# Altium PCB Window Comparator.PcbDoc
Units mil, origin at the board's own origin, x right, y up, seen from the top; angles counter-clockwise.
Board outline 1968.5 x 1771.65 mil, 4 copper layers (Top Layer, Layer 2, Layer 3, Bottom Layer), stack 22.378 mil thick; 17 components, 9 nets, 45 pads, 11 vias.
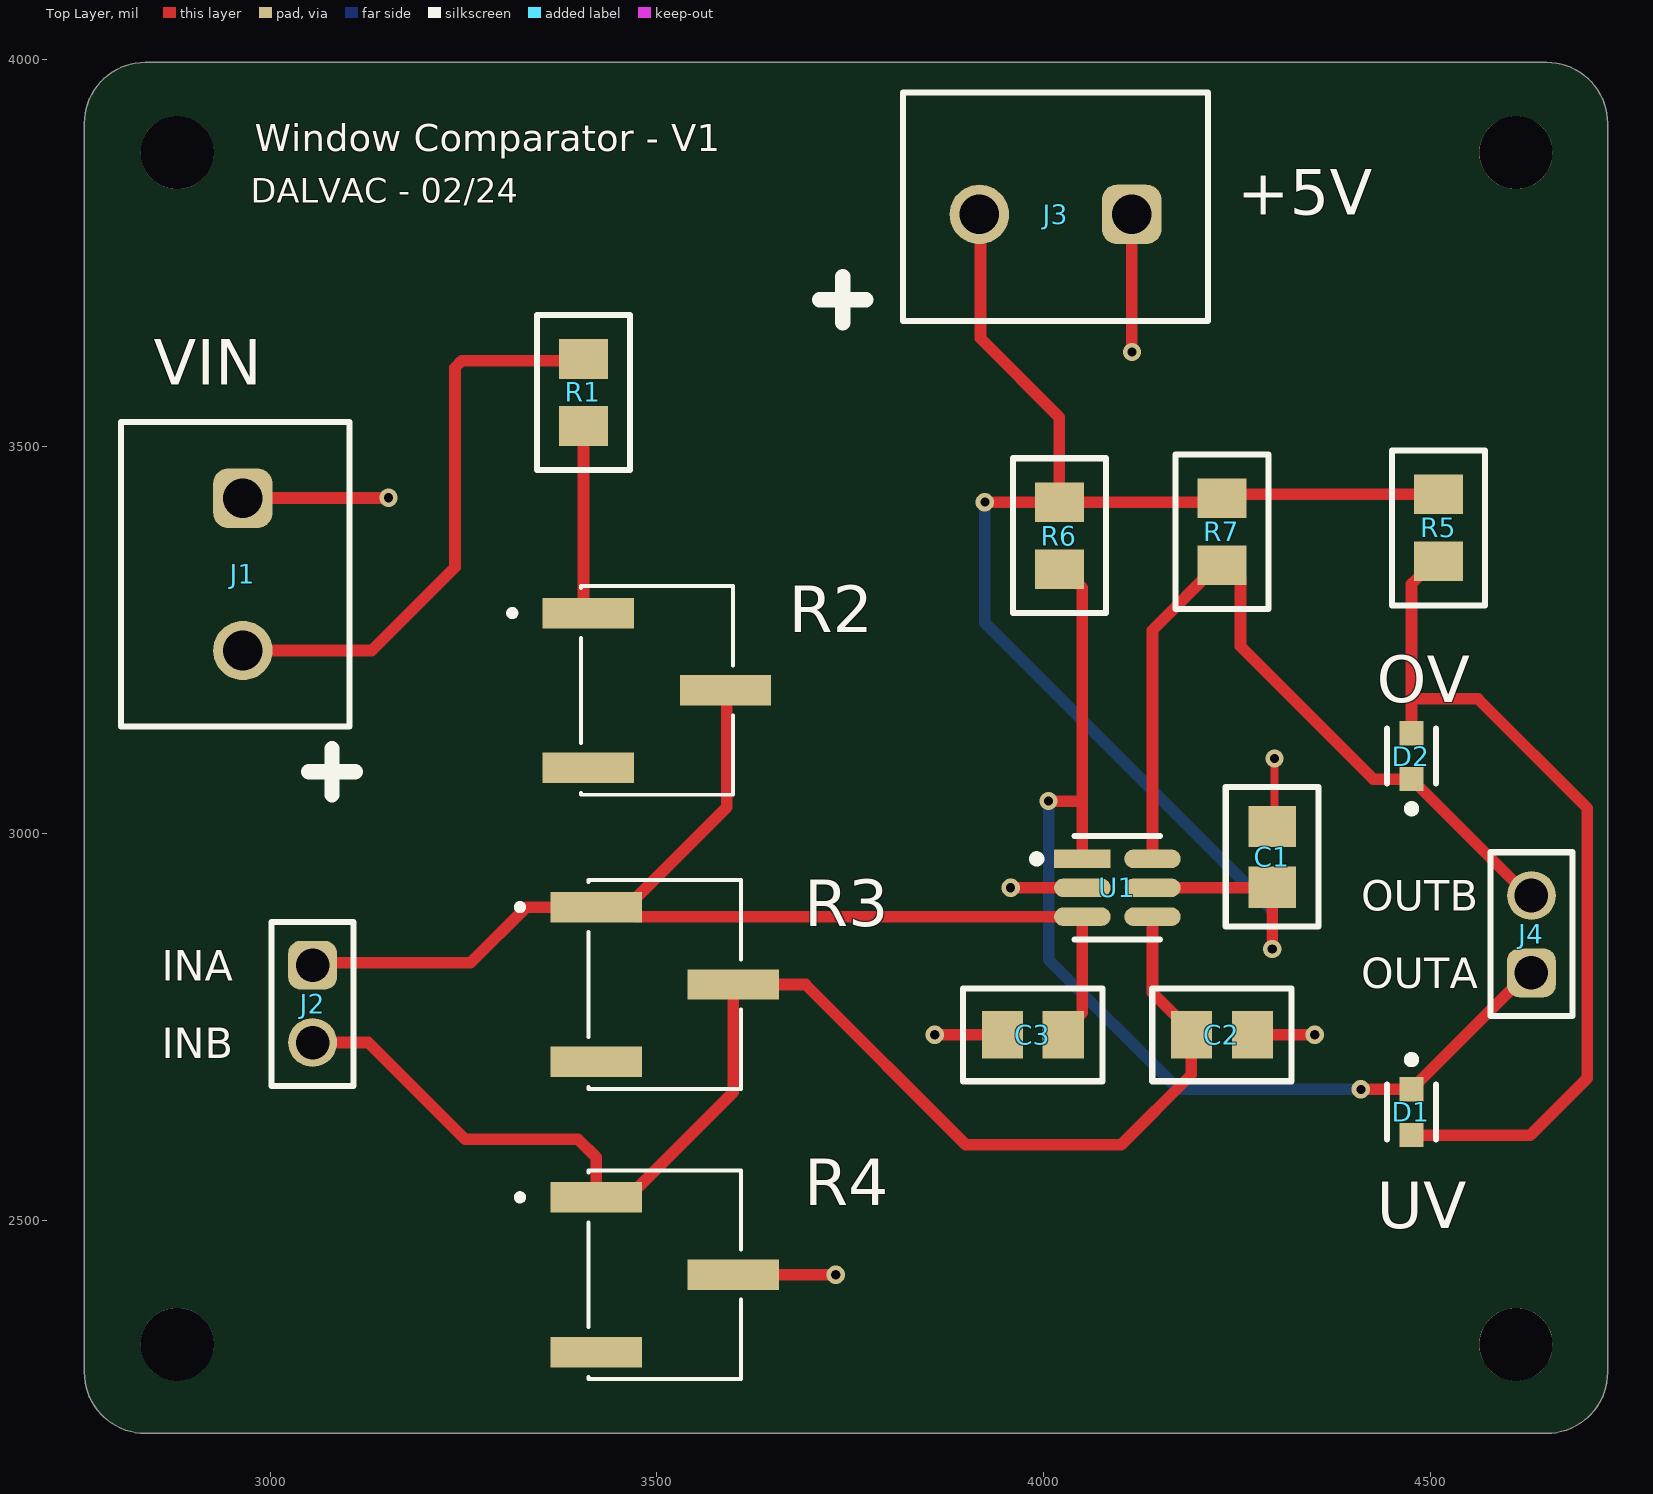
[diagram p0: Top Layer view]
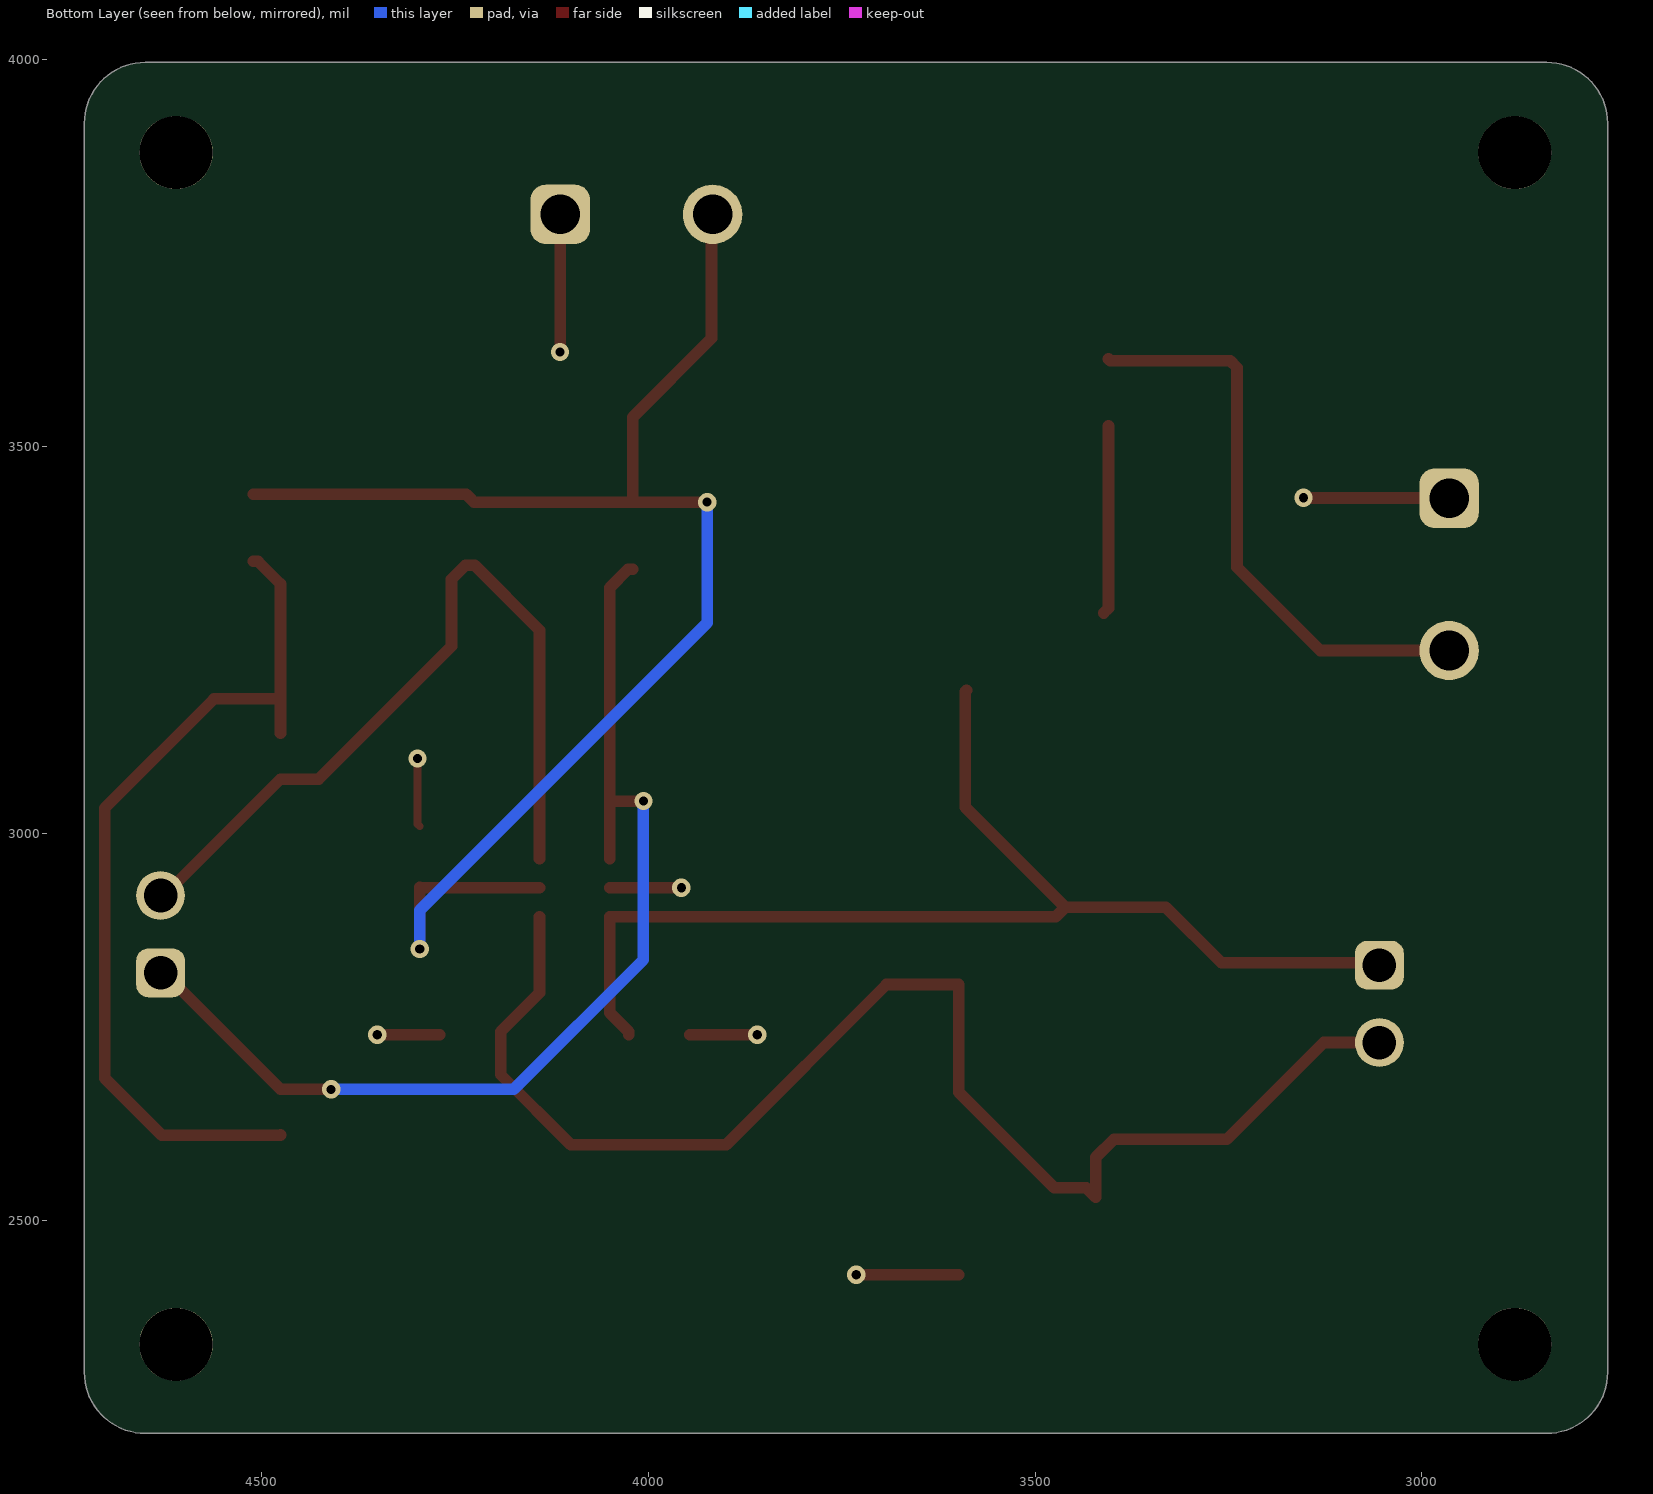
[diagram p1: Bottom Layer view, seen from below]
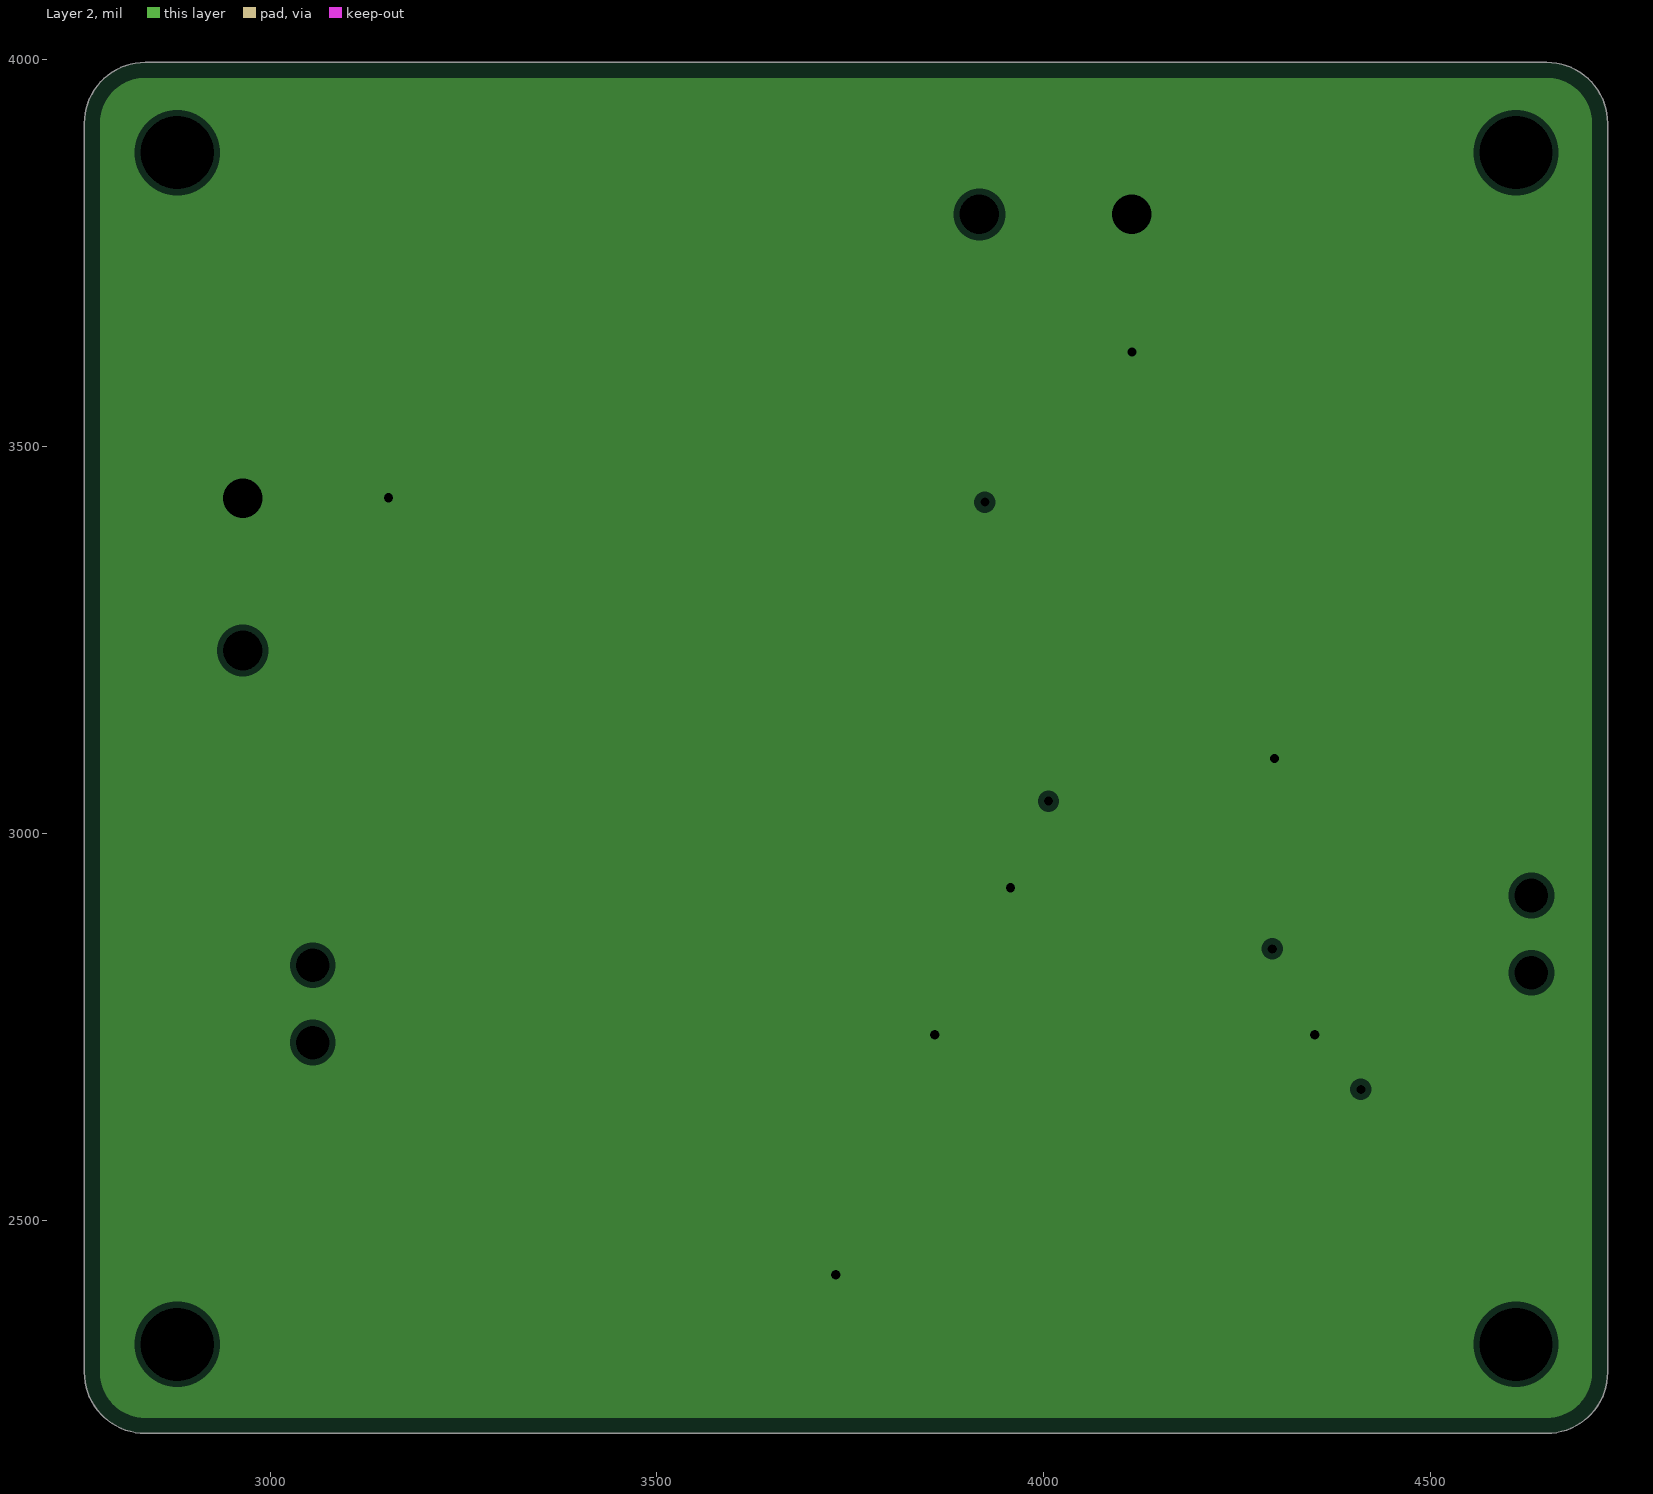
[diagram p2: Layer 2, clearances drawn from the general rule]
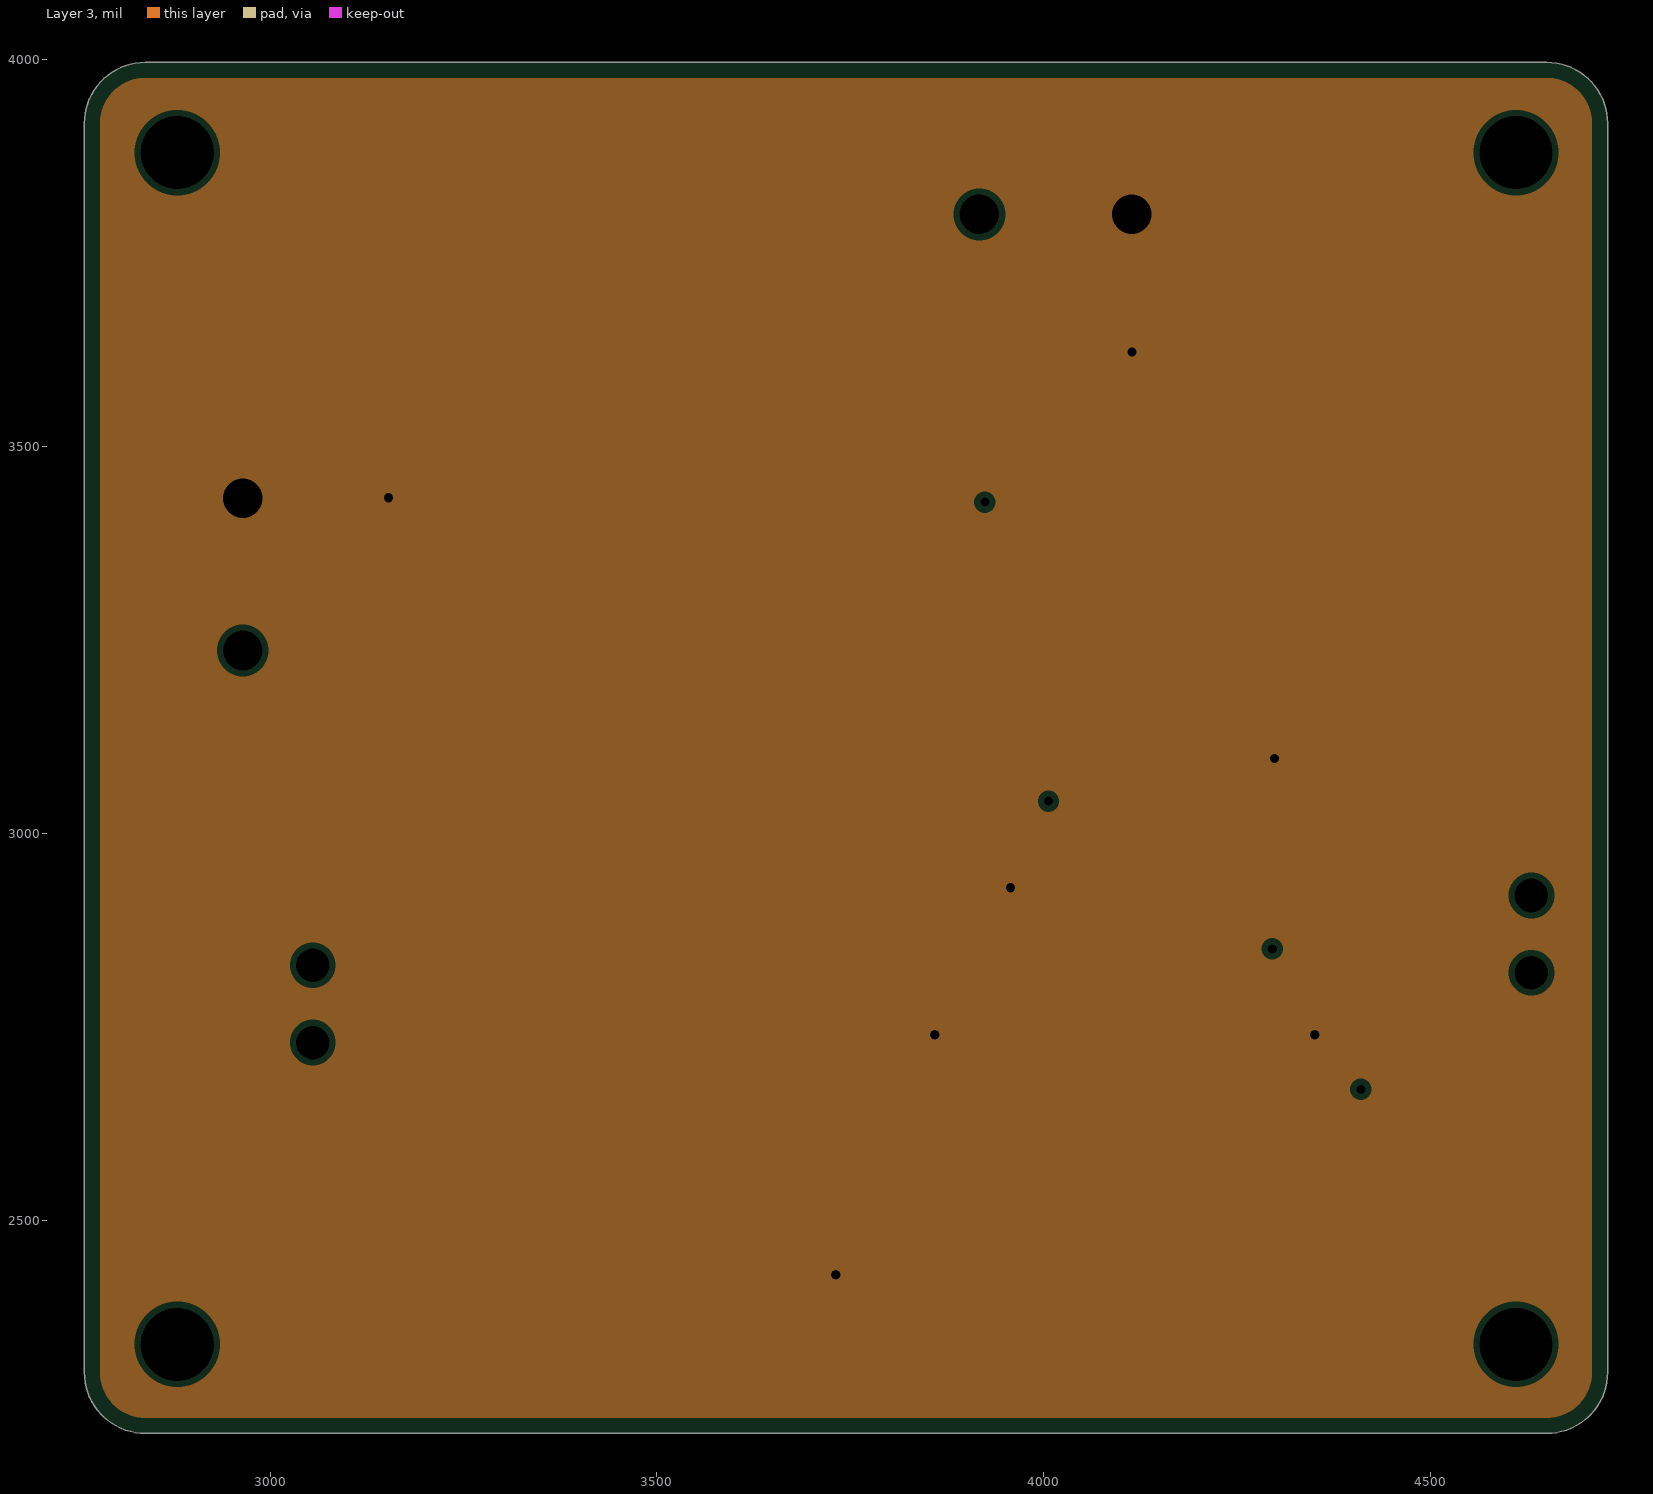
[diagram p3: Layer 3, clearances drawn from the general rule]
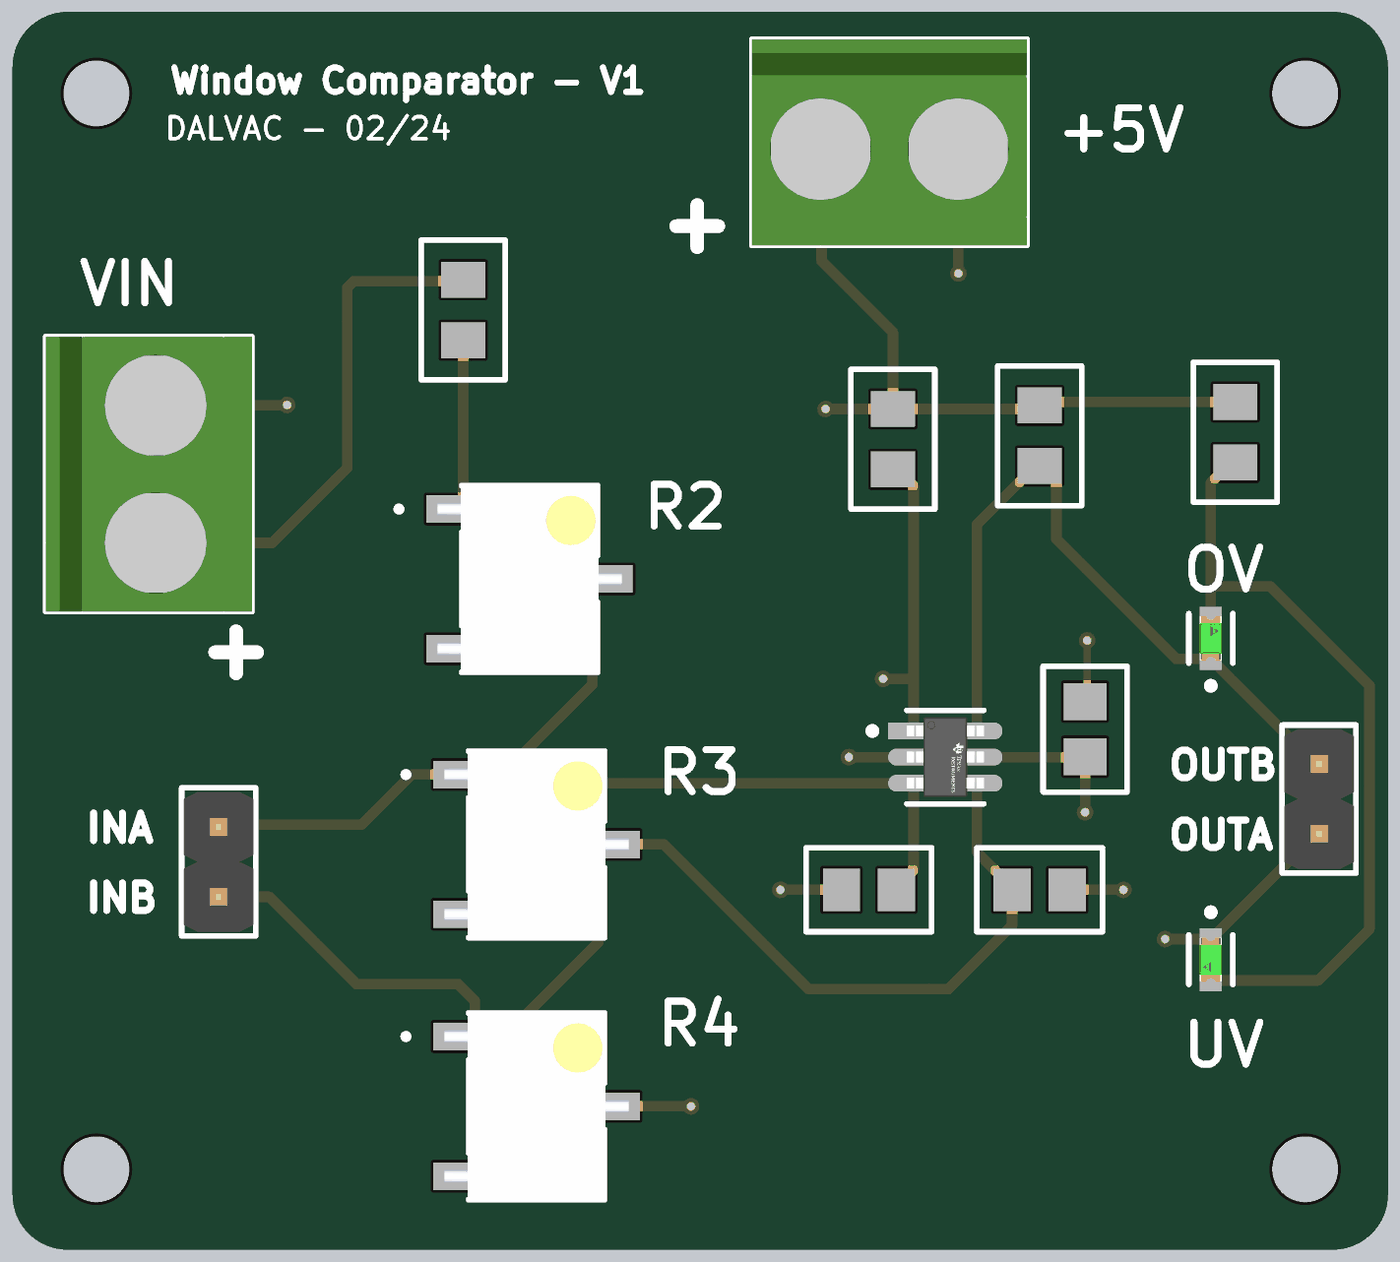
[diagram p4: 3D render of the assembled board from above, using the file's embedded part models]

## Layer stack, top to bottom
Top Solder: solder mask 0.4, Solder Resist, Dk 3.5
Top Layer: signal copper 1.4
Dielectric 2: prepreg 2.8, PP-006, Dk 4.1
Layer 2: plane copper 0.689, net GND
Core: core 12.6, FR-4, Dk 4.8
Layer 3: plane copper 0.689, net GND
Dielectric 3: prepreg 2.8, PP-006, Dk 4.1
Bottom Layer: signal copper 1.4
Bottom Solder: solder mask 0.4, Solder Resist, Dk 3.5

## Board outline
2760,2303.74 2760,3917.91 cw(c2838.74,3917.91) 2838.74,3996.65 4649.76,3996.65 cw(c4649.76,3917.91) 4728.5,3917.91 4728.5,2303.74 cw(c4649.76,2303.74) 4649.76,2225 2838.74,2225 cw(c2838.74,2303.74)

## Design rules (kind name [scope] priority, off if disabled: settings)
Clearance [All] p1: gap=0.25 ignorepadtopadclearanceinfootprint=FALSE
HoleSize [All] p1: absolutevalues=TRUE maxlimit=250 minlimit=7.87 maxpercent=80.000 minpercent=20.000
PlaneClearance [All] p1: clearance=7.87
PlaneConnect [All] p1: planeconnectstyle=Direct reliefexpansion=20 reliefentries=4 reliefconductorwidth=10 reliefairgap=10
PolygonConnect [All] p1: connectstyle=Relief reliefconductorwidth=10 reliefentries=4 polygonreliefangle="90 Angle" airgapwidth=10
RoutingVias [All] p1: holewidth=7.87 width=11.81 viastyle="Through Hole" minholewidth=5.91 minwidth=9.84 maxholewidth=28 maxwidth=50
SolderMaskExpansion [All] p1: expansion=4 istentingtop=FALSE
Width [All] p1: maxlimit=39.37 minlimit=3.54 preferedwidth=11.81
27 further rules are at their usual default settings.

## Components (designator, comment, footprint, x,y, rotation, side; value= is the part's Value field where it differs from the comment)
C1 "10nF" C0805 4295,2970 r90 top
C2 "10nF" C0805 4230,2740 r0 top
C3 "10nF" C0805 3985.63,2740 r180 top
D1 "RED" "LED RED" 4475,2640 r270 top
D2 "RED" "LED RED" 4475,3100 r90 top
J1 "691137710002" "Wire terminal" 2955,3335 r270 top
J2 "61300211121" "Pin connector" 3055,2780 r270 top
J3 "691137710002" "Wire terminal" 4015,3810 r180 top
J4 "61300211121" "Pin connector" 4630,2870 r90 top
R1 "64k9" R0805 3405,3570 r90 top value=64.9kR
R2 "50k" "TS63Y Trimmer" 3500,3185 r0 top value=50kR
R3 "20k" "TS63Y Trimmer" 3510,2805 r0 top value=20kR
R4 "20k" "TS63Y Trimmer" 3510,2430 r0 top value=20kR
R5 "330" R0805 4510,3395 r90 top value=330R
R6 "5k" R0805 4020,3385 r90 top value=5kR
R7 "5k" R0805 4230,3390 r90 top value=5kR
U1 "TLV6710DDCR" TLV6710DDCR 4095,2930 r0 top

## Footprints (in the part's own frame and the unit in brackets; to place one, negate y for a bottom-side part, rotate by r counter-clockwise, add the part's x,y. Pads: shape width x height; smd on the part's side, far side on the other; paste and mask are expansions set on the pad)
C0805 [mm]
  rect 1.35x1.55 smd: 1(-1,0) 2(1,0)
  silkscreen extent -2.29,-1.52 2.29,1.52
"LED RED" [mm]
  rect 0.8x0.8 smd paste+0 mask+0: 1(-0.75,0) 2(0.75,0)
  silkscreen extent -1.85,-0.8 0.9,0.8, body extent -1.25,-0.6 1.25,0.6, height 0.25
"Pin connector" [mm]
  rrect50% 1.6x1.6 hole 1.1: 1(-1.27,0)
  round 1.6 hole 1.1: 2(1.27,0)
  silkscreen extent -2.69,-1.35 2.69,1.35, body extent -2.54,-1.27 2.54,1.27, height 8.57
R0805 [mm]
  rect 1.3x1.6 smd: 1(-1.1,0) 2(1.1,0)
  silkscreen extent -2.54,-1.52 2.54,1.52
TLV6710DDCR [mm]
  rect 1.854x0.612 smd paste+0 mask+0: 1(-1.15,0.95)
  rrect100% 1.854x0.612 smd paste+0 mask+0: 2(-1.15,0) 3(-1.15,-0.95) 4(1.15,-0.95) 5(1.15,0) 6(1.15,0.95)
  silkscreen extent -2.77,-1.7 1.4,1.7, body extent -2.58,-1.95 2.58,1.95, height 0.25
"TS63Y Trimmer" [mm]
  rect 3x1 smd: 1(-2.25,2.54) 2(2.25,0) 3(-2.25,-2.54)
  silkscreen extent -4.85,-3.42 2.5,3.42, body extent -3.35,-3.42 3.35,3.42, height 8
"Wire terminal" [mm]
  rrect50% 1.95x1.95 hole 1.3: 1(-2.5,0.25)
  round 1.95 hole 1.3: 2(2.5,0.25)
  silkscreen extent -5,-3.75 5,3.75, body extent -5,-3.75 5,3.75, height 11.6

## Part data
C1 C2 C3: library part C0805C103K5RECAUTO, "Ceramic Capacitor, Multilayer, Ceramic, 50V, 10% +Tol, 10% -Tol, X7R, 15% TC, 0.01uF, Surface Mount, 0805", Capacitor Type=Ceramic, Manufacturer=KEMET, Supplier Part Number=76AH8705, Category="Ceramic Capacitors", ComponentLink1Description=https://datasheet.ciiva.com:443/pdfs/VipMasterIC/IC/KEME/KEME-S-A0008958450/KEME-S-A0008958450-1.pdf?src-supplier=IHS+Markit, ComponentLink1URL=https://datasheet.ciiva.com:443/pdfs/VipMasterIC/IC/KEME/KEME-S-A0008958450/KEME-S-A0008958450-1.pdf?src-supplier=IHS+Markit, ComponentLink2Description=http://www.farnell.com/datasheets/2723804.pdf?src-supplier=Farnell, ComponentLink2URL=http://www.farnell.com/datasheets/2723804.pdf?src-supplier=Farnell, ComponentLink3Description=https://api.kemet.com/component-edge/download/datasheet/C0805C103K5RECAUTO.pdf?src-supplier=Digikey, ComponentLink3URL=https://api.kemet.com/component-edge/download/datasheet/C0805C103K5RECAUTO.pdf?src-supplier=Digikey, ComponentLink4Description=http://www.farnell.com/datasheets/2723804.pdf?src-supplier=Newark, ComponentLink4URL=http://www.farnell.com/datasheets/2723804.pdf?src-supplier=Newark, Dielectric Material=Ceramic, Manufacturer Part Number=C0805C103K5RECAUTO, Pins=2, Pricing="1=0.015, 25=0.015, 50=0.015 (USD)", Reach SVHC Compliant=Yes, RoHS=Yes, RoHS Compliant=Yes, Stock=500, Supplier=Newark
D1 D2: library part VLMS1300-GS08, "Single Color LED, Super Red, 1.1mm", Color=Red, Forward Current=30mA, Forward Voltage=2.4V, Manufacturer="Vishay Semiconductors", Max Operating Temperature=85°C, Min Operating Temperature=-35°C, Reverse Voltage-Max=5V, Supplier Part Number=78-VLMS1300-GS08, Additional Feature="HIGH RELIABILITY", Category=LEDs, Channels=1, Color@wavelength=Red, ComponentLink1Description=https://datasheet.ciiva.com:443/pdfs/VipMasterIC/IC/VISH/VISH-S-A0004564149/VISH-S-A0004564149-1.pdf?src-supplier=IHS+Markit, ComponentLink1URL=https://datasheet.ciiva.com:443/pdfs/VipMasterIC/IC/VISH/VISH-S-A0004564149/VISH-S-A0004564149-1.pdf?src-supplier=IHS+Markit, ComponentLink2Description=https://datasheet.ciiva.com/26322/vlmo1300-26322153.pdf?src-supplier=Element14, ComponentLink2URL=https://datasheet.ciiva.com/26322/vlmo1300-26322153.pdf?src-supplier=Element14, ComponentLink3Description=https://datasheet.ciiva.com/8028/vlmo1300-8028047.pdf?src-supplier=Element14, ComponentLink3URL=https://datasheet.ciiva.com/8028/vlmo1300-8028047.pdf?src-supplier=Element14, ComponentLink4Description=https://datasheet.ciiva.com/9333/vlmo1300-9333743.pdf?src-supplier=Avnet, ComponentLink4URL=https://datasheet.ciiva.com/9333/vlmo1300-9333743.pdf?src-supplier=Avnet, ComponentLink5Description=https://datasheet.ciiva.com/16510/vlmo1300-16510985.pdf?src-supplier=Future+Electronics, ComponentLink5URL=https://datasheet.ciiva.com/16510/vlmo1300-16510985.pdf?src-supplier=Future+Electronics, Luminous Intensity-Nom=54mcd, Manufacturer Part Number=VLMS1300-GS08, Mounting Technology="Surface Mount", Optoelectronic Device Type="SINGLE COLOR LED", Overall Height=0.8mm, Packaging="Tape and Reel", Pins=2, Pricing="1=0.27, 10=0.217, 50=0.217, 100=0.091, 1000=0.075, 10000=0.052 (USD)", Reach SVHC Compliant=Yes, RoHS=Yes, RoHS Compliant=Yes, Shape=Rectangular, Size=1.1mm, Stock=39915, Supplier=Mouser, Terminal Pitch=1.5mm, Viewing Angle=130°
J1 J3: "Barrier Strip Terminal Block", Manufacturer="Wurth Electronics", Supplier Part Number=1770020, Category="Terminal Blocks", ComponentLink1Description=https://datasheet.ciiva.com:443/pdfs/VipMasterIC/IC/MIDC/MIDC-S-A0005074262/MIDC-S-A0004711666-1.pdf?src-supplier=IHS+Markit, ComponentLink1URL=https://datasheet.ciiva.com:443/pdfs/VipMasterIC/IC/MIDC/MIDC-S-A0005074262/MIDC-S-A0004711666-1.pdf?src-supplier=IHS+Markit, ComponentLink2Description=https://katalog.we-online.de/em/datasheet/691137710002.pdf?src-supplier=Digikey, ComponentLink2URL=https://katalog.we-online.de/em/datasheet/691137710002.pdf?src-supplier=Digikey, Manufacturer Part Number=691137710002, Pricing="5=0.374, 25=0.336, 50=0.306, 100=0.28, 250=0.26 (EUR)", RoHS=No, RoHS Compliant=Yes, Stock=15, Supplier=Rs
J2 J4: "Board Connector, 2 Contact(s), 1 Row(s), Male, Straight, 0.1 inch Pitch, Solder Terminal, Locking, Black Insulator, Plug", Contact Resistance=20mR, Dielectric Withstanding Voltage (AC)=500V, Flammability Rating="UL94 V-0", Insulation Color=Black, Insulation Resistance=1GR, Manufacturer="Wurth Electronics", Max Operating Temperature=125°C, Min Operating Temperature=-40°C, Rated Current (Signal)=3A, Supplier Part Number=1725138, Body Breadth=0.1inch, Body Depth=0.1inch, Body Length=0.2inch, Body/Shell Style=PLUG, Category="Headers and Wire Housings", ComponentLink1Description=https://datasheet.ciiva.com:443/pdfs/VipMasterIC/IC/MIDC/MIDCS07676/MIDCS07676-1.pdf?src-supplier=IHS+Markit, ComponentLink1URL=https://datasheet.ciiva.com:443/pdfs/VipMasterIC/IC/MIDC/MIDCS07676/MIDCS07676-1.pdf?src-supplier=IHS+Markit, ComponentLink2Description=https://datasheet.ciiva.com/13619/6130xx11121-48870-13619345.pdf?src-supplier=Mouser, ComponentLink2URL=https://datasheet.ciiva.com/13619/6130xx11121-48870-13619345.pdf?src-supplier=Mouser, Connector Type="BOARD CONNECTOR", Contact Finish - Mating=GOLD, Contact Finish - Termination="Gold (Au) - with Nickel (Ni) barrier", Contact Gender=Male, Contact Material="Copper Alloy", Contact Pattern=RECTANGULAR, Contact Style="SQ PIN-SKT", DIN Conformance=No, Filter Feature=No, IEC Conformance=No, Insulation Material=Polybutylene, JESD-609 Code=e4, Manufacturer Part Number=61300211121, Mating Contact Pitch=0.1inch, MIL Conformance=No, Mixed Contacts=No, Mounting Option 1=LOCKING, Mounting Style=STRAIGHT, Mounting Technology=Board, Number Of Connectors=1, Number of Contacts=2, Number of Rows Loaded=1, Option="General Purpose", PCB Contact Pattern=RECTANGULAR, Pricing="1000=0.063 (EUR)", Reach SVHC Compliant=Yes, Reference Standard=UL, Reliability=COMMERCIAL, RoHS=Yes, RoHS Compliant=Yes, Stock=2265, Supplier=Rs, Terminal Length=0.118inch, Terminal Pitch=2.54mm, Termination=Solder
R1: library part CRCW080564K9FKEA, "Fixed Resistor, Metal Glaze/thick Film, 0.125W, 64900ohm, 150V, 1% +/-Tol, 100ppm/Cel, Surface Mount, 0805", Case/Package=0805, Manufacturer=Vishay, Max Operating Temperature=155°C, Min Operating Temperature=-55°C, Package Height=0.45mm, Package Length=2mm, Package Shape=Rectangular, Package Style=SMTMeter, Package Width=1.25mm, Power=125mW, Rated Temperature=70°C, Resistor Type="FIXED RESISTOR", Supplier Part Number=5035246, Temperature Coefficient=100ppm/°C, Tolerance=1%, Working Voltage=150V, Category="Chip SMD Resistors", ComponentLink1Description=https://datasheet.ciiva.com:443/pdfs/VipMasterIC/IC/VISH/VISH-S-A0007266705/VISH-S-A0007266705-1.pdf?src-supplier=IHS+Markit, ComponentLink1URL=https://datasheet.ciiva.com:443/pdfs/VipMasterIC/IC/VISH/VISH-S-A0007266705/VISH-S-A0007266705-1.pdf?src-supplier=IHS+Markit, ComponentLink2Description=https://datasheet.ciiva.com/7726/66915-7726047.pdf?src-supplier=Element14, ComponentLink2URL=https://datasheet.ciiva.com/7726/66915-7726047.pdf?src-supplier=Element14, ComponentLink3Description=https://datasheet.ciiva.com/8994/dcrcwe3-8994359.pdf?src-supplier=Avnet, ComponentLink3URL=https://datasheet.ciiva.com/8994/dcrcwe3-8994359.pdf?src-supplier=Avnet, ComponentLink4Description=https://datasheet.ciiva.com/5547/dcrcwe3-109170-5547542.pdf?src-supplier=Mouser, ComponentLink4URL=https://datasheet.ciiva.com/5547/dcrcwe3-109170-5547542.pdf?src-supplier=Mouser, ComponentLink5Description=https://datasheet.ciiva.com/16776/70201119-16776154.pdf?src-supplier=Allied+Electronics, ComponentLink5URL=https://datasheet.ciiva.com/16776/70201119-16776154.pdf?src-supplier=Allied+Electronics, ComponentLink6Description=https://datasheet.ciiva.com/2495/dcrcwe3-2495968.pdf?src-supplier=Digikey, ComponentLink6URL=https://datasheet.ciiva.com/2495/dcrcwe3-2495968.pdf?src-supplier=Digikey, ComponentLink7Description=https://datasheet.ciiva.com/2495/dcrcwe3-2495969.pdf?src-supplier=Digikey, ComponentLink7URL=https://datasheet.ciiva.com/2495/dcrcwe3-2495969.pdf?src-supplier=Digikey, ComponentLink8Description=https://datasheet.ciiva.com/2495/dcrcwe3-2495970.pdf?src-supplier=Digikey, ComponentLink8URL=https://datasheet.ciiva.com/2495/dcrcwe3-2495970.pdf?src-supplier=Digikey, Construction=Chip, JESD-609 Code=e3, Manufacturer Part Number=CRCW080564K9FKEA, Mounting Technology="Surface Mount", Packaging="Tape and Reel", Pins=2, Pricing="5000=0.0061, 20000=0.0059, 75000=0.0056, 150000=0.0055, 375000=0.0052 (USD)", Reach SVHC Compliant=Yes, Reference Standard=AEC-Q200, RoHS=Yes, RoHS Compliant=Yes, Stock=15000, Supplier="Future Electronics", Technology="METAL GLAZE/THICK FILM", Terminal Finish=Nickel, Termination=Wraparound
R2: library part TS63Y503KR10, "Trimmer, Cermet, 0.25W, 50000ohm, 112V, 10% +/-Tol, 100ppm/Cel, 14 Turn(s), 2720", Case/Package=2720, Manufacturer="Vishay Sfernice", Max Operating Temperature=155°C, Min Operating Temperature=-55°C, Package Height=6.85mm, Package Style=SMTMeter, Package Width=5mm, Power=250mW, Rated Temperature=70°C, Resistance Law=Linear, Resistor Type=TRIMMER, Supplier Part Number=TS63Y-50KTR-ND, Temperature Coefficient=100ppm/°C, Tolerance=10%, Working Voltage=112V, Actuator Orientation=Vertical, Actuator Type=SCREW, Category="Variable Resistors and Potentiometers", ComponentLink1Description=https://datasheet.ciiva.com:443/pdfs/VipMasterIC/IC/VISH/VISH-S-A0006600877/VISH-S-A0006600877-1.pdf?src-supplier=IHS+Markit, ComponentLink1URL=https://datasheet.ciiva.com:443/pdfs/VipMasterIC/IC/VISH/VISH-S-A0006600877/VISH-S-A0006600877-1.pdf?src-supplier=IHS+Markit, ComponentLink2Description=https://datasheet.ciiva.com/2156/ts63-2156492.pdf?src-supplier=Digikey, ComponentLink2URL=https://datasheet.ciiva.com/2156/ts63-2156492.pdf?src-supplier=Digikey, ComponentLink3Description=https://datasheet.ciiva.com/16716/70218793-16716796.pdf?src-supplier=Allied+Electronics, ComponentLink3URL=https://datasheet.ciiva.com/16716/70218793-16716796.pdf?src-supplier=Allied+Electronics, ComponentLink4Description=https://datasheet.ciiva.com/2156/ts63-2156493.pdf?src-supplier=Digikey, ComponentLink4URL=https://datasheet.ciiva.com/2156/ts63-2156493.pdf?src-supplier=Digikey, ComponentLink5Description=https://datasheet.ciiva.com/2156/ts63-2156494.pdf?src-supplier=Digikey, ComponentLink5URL=https://datasheet.ciiva.com/2156/ts63-2156494.pdf?src-supplier=Digikey, ComponentLink6Description=https://datasheet.ciiva.com/8697/ts63-8697838.pdf?src-supplier=Avnet, ComponentLink6URL=https://datasheet.ciiva.com/8697/ts63-8697838.pdf?src-supplier=Avnet, Construction=Rectangular, Ganging Number=1, JESD-609 Code=e3, Lead Diameter=0.45mm, Manufacturer Part Number=TS63Y503KR10, Mounting Technology="Surface Mount", Number of Turns=14, Package Length=6.85mm, Packaging="Tape and Reel", Pins=3, Pricing="500=2.7472, 1000=2.5755, 2500=2.4038 (USD)", Reach SVHC Compliant=No, RoHS=Yes, RoHS Compliant=Yes, Rotational Angle=5040°, Stock=1000, Supplier=Digikey, Technology=CERMET, Terminal Finish=Tin, Termination=Wire
R3 R4: library part TS63Y203KR10, "Trimmer, Cermet, 0.25W, 20000ohm, 70.7V, 10% +/-Tol, 100ppm/Cel, 14 Turn(s), 2720", Case/Package=2720, Manufacturer="Vishay Sfernice", Max Operating Temperature=155°C, Min Operating Temperature=-55°C, Package Height=6.85mm, Package Style=SMTMeter, Package Width=5mm, Power=250mW, Rated Temperature=70°C, Resistance Law=Linear, Resistor Type=TRIMMER, Supplier Part Number=TS63Y-20KTR-ND, Temperature Coefficient=100ppm/°C, Tolerance=10%, Working Voltage=70.7V, Actuator Orientation=Vertical, Actuator Type=SCREW, Category="Variable Resistors and Potentiometers", ComponentLink1Description=https://datasheet.ciiva.com:443/pdfs/VipMasterIC/IC/VISH/VISH-S-A0006600877/VISH-S-A0006600877-1.pdf?src-supplier=IHS+Markit, ComponentLink1URL=https://datasheet.ciiva.com:443/pdfs/VipMasterIC/IC/VISH/VISH-S-A0006600877/VISH-S-A0006600877-1.pdf?src-supplier=IHS+Markit, ComponentLink2Description=https://datasheet.ciiva.com/2156/ts63-2156501.pdf?src-supplier=Digikey, ComponentLink2URL=https://datasheet.ciiva.com/2156/ts63-2156501.pdf?src-supplier=Digikey, ComponentLink3Description=https://datasheet.ciiva.com/2156/ts63-2156502.pdf?src-supplier=Digikey, ComponentLink3URL=https://datasheet.ciiva.com/2156/ts63-2156502.pdf?src-supplier=Digikey, ComponentLink4Description=https://datasheet.ciiva.com/2156/ts63-2156503.pdf?src-supplier=Digikey, ComponentLink4URL=https://datasheet.ciiva.com/2156/ts63-2156503.pdf?src-supplier=Digikey, ComponentLink5Description=https://datasheet.ciiva.com/16716/70218793-16716461.pdf?src-supplier=Allied+Electronics, ComponentLink5URL=https://datasheet.ciiva.com/16716/70218793-16716461.pdf?src-supplier=Allied+Electronics, Construction=Rectangular, Ganging Number=1, JESD-609 Code=e3, Lead Diameter=0.45mm, Manufacturer Part Number=TS63Y203KR10, Mounting Technology="Surface Mount", Number of Turns=14, Package Length=6.85mm, Packaging="Tape and Reel", Pins=3, Pricing="500=2.7472, 1000=2.5755, 2500=2.4038 (USD)", Reach SVHC Compliant=No, RoHS=Yes, RoHS Compliant=Yes, Rotational Angle=5040°, Stock=1500, Supplier=Digikey, Technology=CERMET, Terminal Finish=Tin, Termination=Wire
R5: library part CRCW0805330RJNEAC, "Fixed Resistor, Metal Glaze/thick Film, 0.125W, 330ohm, 150V, 5% +/-Tol, 200ppm/Cel, Surface Mount, 0805", Case/Package=0805, Manufacturer=Vishay, Max Operating Temperature=155°C, Min Operating Temperature=-55°C, Package Height=0.5mm, Package Length=2mm, Package Style=SMTMeter, Package Width=1.25mm, Power=125mW, Resistor Type="FIXED RESISTOR", Supplier Part Number=541-4168-2-ND, Temperature Coefficient=-200200ppm/°C, Tolerance=5%, Working Voltage=150V, Category="Chip SMD Resistors", ComponentLink1Description=https://datasheet.ciiva.com:443/pdfs/VipMasterIC/IC/VISH/VISH-S-A0003599164/VISH-S-A0003599164-1.pdf?src-supplier=IHS+Markit, ComponentLink1URL=https://datasheet.ciiva.com:443/pdfs/VipMasterIC/IC/VISH/VISH-S-A0003599164/VISH-S-A0003599164-1.pdf?src-supplier=IHS+Markit, ComponentLink2Description=http://www.vishay.com/docs/28773/crcwce3.pdf?src-supplier=Digikey, ComponentLink2URL=http://www.vishay.com/docs/28773/crcwce3.pdf?src-supplier=Digikey, Construction=Chip, JESD-609 Code=e3, Manufacturer Part Number=CRCW0805330RJNEAC, Packaging="Tape and Reel", Pins=2, Pricing="5000=0.00613, 10000=0.00544, 25000=0.00472, 35000=0.0046, 50000=0.00428, 125000=0.00391 (USD)", Reach SVHC Compliant=Yes, RoHS=Yes, RoHS Compliant=Yes, Stock=330000, Supplier=Digikey, Technology="METAL GLAZE/THICK FILM", Terminal Finish=Nickel
R6 R7: library part CRCW08055K00JNTA, "SMD Chip Resistor, 5 kOhm, ± 5%, 125 mW, 0805 [2012 Metric], Thick Film, General Purpose", Case/Package=0805, Manufacturer=Vishay, Max Operating Temperature=155°C, Min Operating Temperature=-55°C, Package Shape=Rectangular, Power=125mW, Rated Temperature=70°C, Resistor Type="FIXED RESISTOR", Supplier Part Number=3975011RL, Temperature Coefficient=200ppm/°C, Tolerance=5%, Working Voltage=150V, Category="Chip SMD Resistors", ComponentLink1Description=https://datasheet.ciiva.com:443/pdfs/VipMasterIC/IC/VISH/VISHS17577/VISHS17577-1.pdf?src-supplier=IHS+Markit, ComponentLink1URL=https://datasheet.ciiva.com:443/pdfs/VipMasterIC/IC/VISH/VISHS17577/VISHS17577-1.pdf?src-supplier=IHS+Markit, ComponentLink2Description=http://www.mouser.com/ds/2/427/dcrcw-72725.pdf?src-supplier=Mouser, ComponentLink2URL=http://www.mouser.com/ds/2/427/dcrcw-72725.pdf?src-supplier=Mouser, ComponentLink3Description=http://www.vishay.com/docs/20008/dcrcw.pdf?src-supplier=Digikey, ComponentLink3URL=http://www.vishay.com/docs/20008/dcrcw.pdf?src-supplier=Digikey, ComponentLink4Description=https://datasheet.octopart.com/CRCW08055K00JNTA-Vishay-datasheet-137115208.pdf?src-supplier=X-ON, ComponentLink4URL=https://datasheet.octopart.com/CRCW08055K00JNTA-Vishay-datasheet-137115208.pdf?src-supplier=X-ON, ComponentLink5Description=https://datasheet.octopart.com/CRCW08055K00JNTA-Vishay-datasheet-62316123.pdf?src-supplier=Future+Electronics, ComponentLink5URL=https://datasheet.octopart.com/CRCW08055K00JNTA-Vishay-datasheet-62316123.pdf?src-supplier=Future+Electronics, ComponentLink6Description=https://datasheet.octopart.com/D-CRCW-Lead-%28Pb%29-Bearing-Thick-Film%2C-Rectangular-Chip-Resistors-Vishay-datasheet-family-72.pdf, ComponentLink6URL=https://datasheet.octopart.com/D-CRCW-Lead-%28Pb%29-Bearing-Thick-Film%2C-Rectangular-Chip-Resistors-Vishay-datasheet-family-72.pdf, ComponentLink7Description=https://datasheet.octopart.com/CRCW08055K00JNTA-Vishay-datasheet-13242068.pdf, ComponentLink7URL=https://datasheet.octopart.com/CRCW08055K00JNTA-Vishay-datasheet-13242068.pdf, ComponentLink8Description=https://datasheet.octopart.com/CRCW08055K00JNTA-Vishay-datasheet-13195083.pdf, ComponentLink8URL=https://datasheet.octopart.com/CRCW08055K00JNTA-Vishay-datasheet-13195083.pdf, ComponentLink9Description=https://datasheet.octopart.com/CRCW08055K00JNTA-Vishay-datasheet-13034211.pdf, ComponentLink9URL=https://datasheet.octopart.com/CRCW08055K00JNTA-Vishay-datasheet-13034211.pdf, ComponentLink10Description=https://datasheet.octopart.com/CRCW08055K00JNTA-Vishay-datasheet-12600034.pdf, ComponentLink10URL=https://datasheet.octopart.com/CRCW08055K00JNTA-Vishay-datasheet-12600034.pdf, ComponentLink11Description=https://datasheet.octopart.com/CRCW08055K00JNTA-Vishay-datasheet-12532161.pdf, ComponentLink11URL=https://datasheet.octopart.com/CRCW08055K00JNTA-Vishay-datasheet-12532161.pdf, ComponentLink12Description=https://datasheet.octopart.com/CRCW08055K00JNTA-Vishay-datasheet-12517896.pdf, ComponentLink12URL=https://datasheet.octopart.com/CRCW08055K00JNTA-Vishay-datasheet-12517896.pdf, ComponentLink13Description=https://datasheet.octopart.com/CRCW08055K00JNTA-Vishay-datasheet-12509762.pdf, ComponentLink13URL=https://datasheet.octopart.com/CRCW08055K00JNTA-Vishay-datasheet-12509762.pdf, ComponentLink14Description=https://datasheet.octopart.com/CRCW08055K00JNTA-Vishay-datasheet-10322335.pdf, ComponentLink14URL=https://datasheet.octopart.com/CRCW08055K00JNTA-Vishay-datasheet-10322335.pdf, ComponentLink15Description=https://datasheet.octopart.com/CRCW08055K00JNTA-Vishay-datasheet-8788789.pdf, ComponentLink15URL=https://datasheet.octopart.com/CRCW08055K00JNTA-Vishay-datasheet-8788789.pdf, ComponentLink16Description=https://datasheet.octopart.com/CRCW08055K00JNTA-Vishay-datasheet-8361388.pdf, ComponentLink16URL=https://datasheet.octopart.com/CRCW08055K00JNTA-Vishay-datasheet-8361388.pdf, ComponentLink17Description=https://datasheet.octopart.com/CRCW08055K00JNTA-Vishay-datasheet-5306405.pdf, ComponentLink17URL=https://datasheet.octopart.com/CRCW08055K00JNTA-Vishay-datasheet-5306405.pdf, ComponentLink18Description=https://datasheet.octopart.com/CRCW08055K00JNTA-Vishay-datasheet-546287.pdf, ComponentLink18URL=https://datasheet.octopart.com/CRCW08055K00JNTA-Vishay-datasheet-546287.pdf, JESD-609 Code=e0, Manufacturer Part Number=CRCW08055K00JNTA, Mounting Technology="Surface Mount", Packaging="Tape and Reel", Pins=2, Pricing="500=0.035, 1000=0.02, 2500=0.019, 5000=0.018, 25000=0.017, 50000=0.016 (EUR)", Reach SVHC Compliant=No, Reference Standard=AEC-Q200, RoHS Compliant=No, Stock=3610, Supplier=Farnell, Technology="METAL GLAZE/THICK FILM", Terminal Finish=Nickel, Termination=Wraparound
U1: "Comparator, 2 Func, 2000uV Offset-Max, 28100ns Response Time, PDSO6", Manufacturer="Texas Instruments", Amplifier Type=COMPARATOR, Category="Amplifiers - Op Amps, Buffer, Instrumentation", ComponentLink1Description=https://www.ti.com:443/lit/ds/symlink/tlv6710.pdf?src-supplier=IHS+Markit, ComponentLink1URL=https://www.ti.com:443/lit/ds/symlink/tlv6710.pdf?src-supplier=IHS+Markit, ComponentLink2Description=http://www.ti.com/general/docs/suppproductinfo.tsp?distId=10&amp;gotoUrl=http%3A%2F%2Fwww.ti.com%2Flit%2Fgpn%2Ftlv6710&src-supplier=Digikey, ComponentLink2URL=http://www.ti.com/general/docs/suppproductinfo.tsp?distId=10&amp;gotoUrl=http%3A%2F%2Fwww.ti.com%2Flit%2Fgpn%2Ftlv6710&src-supplier=Digikey, JESD-609 Code=e4, Manufacturer Part Number=TLV6710DDCR, Moisture Sensitivity Level=2, Pricing="3000=1.08, 6000=1.0352 (USD)", Reach SVHC Compliant=Yes, RoHS=Yes, RoHS Compliant=Yes, Stock=6000, Supplier="Arrow Electronics", Supplier Part Number=TLV6710DDCR, Terminal Finish=Nickel

## Free pads (board coordinates)
  round 94.49 hole 94.49 unplated: ""(2880,2340) ""(2880,3880) ""(4610,2340) ""(4610,3880)

## Via types
v1: diameter 23.62, hole 11.81, Top Layer to Bottom Layer, tented both sides, 11 vias

## Nets (pads, with @x,y where several pads share a name; then routed paths per layer and width w, separated by ;. In a path a pad name is that pad's centre, name@x,y a point inside that pad or via, vN(x,y) a via of type N, cw(c..) or ccw(c..) an arc to the next point about the centre after c; other vN are vias at no path point)
+5: C1.1 J3.2 R5.2 R6.2 R7.2 U1.5 | length 1971.8
  Top Layer w15: J3.2 3918,3798.73 3918,3640 4020,3538 R6.2 ; v1@3923,3429 v1(3923.69,3428.31) R6.2 ; U1.5 4294.37,2930 C1.1 v1(4295,2851) ; R5.2 4235,3438.31 R7.2 4225,3428.31 R6.2
  Bottom Layer w15: v1(3923.69,3428.31) 3923.69,3272.31 4295,2901 v1(4295,2851)
GND: C1.2 C2.2 C3.2 J1.1 J3.1 R4.2 U1.2 | length 850.1
  Top Layer w10: C1.2 4298,3012.37 v1(4298,3097)
  Top Layer w15: J1.1 2965.13,3433.71 3152.71,3433.71 v1(3153,3434) ; R4.2 v1(3731,2430) v1@3732,2431 ; v1(3859,2740) C3.2 ; v1(3957,2930) U1.2 ; J3.1 4113.43,3622.57 v1@4114,3622 ; C2.2 v1(4350,2740)
  other v1: 4113.71,3622.29
INA: C3.1 J2.1 R2.2 R3.1 U1.3 | length 1527.9
  Top Layer w15: J2.1 3058,2833 3259,2833 3331,2905 R3.1 R3.1@3460.79,2905 ; R2.2 3590,3183.58 3590,3034.21 R3.1@3460.79,2905 ; C3.1 4025,2743.94 4049.71,2768.65 U1.3 3473.19,2892.6 R3.1@3460.79,2905
INB: C2.1 J2.2 R3.2 R4.1 U1.4 | length 1792.4
  Top Layer w15: J2.2 3127,2730 3252,2605 3398,2605 3421.42,2581.58 R4.1 3433.6,2542.19 3475.19,2542.19 3598.58,2665.58 R3.2 3692,2805 3899,2598 4100,2598 4190.63,2688.63 C2.1 4190.63,2743.94 4140.29,2794.28 U1.4
LED_IND: D1.2 D2.2 R5.1 | length 1132.2
  Top Layer w15: D1.2 4475.24,2610.24 4628.24,2610.24 4702,2684 4702,3033 4561,3174 4475,3174 ; D2.2 4475,3174 ; R5.1 4504.09,3351.69 4475,3322.6 4475,3174
NetR1_1: R1.1 R2.1 | length 244.4
  Top Layer w15: R1.1 3405,3291.42 R2.1
OUTA: D1.1 J4.1 R6.1 U1.1 | length 1396.6
  Top Layer w15: v1@4005,3041 v1(4006,3042) 4049.71,3042 ; R6.1 4025.91,3341.69 4049.71,3317.89 4049.71,3042 ; U1.1 4049.71,3042 ; v1@4409,2669 v1(4409.53,2669.53) D1.1 4606.57,2801.1 4611.1,2801.1 J4.1
  Bottom Layer w15: v1(4006,3042) 4006,2837 4173.47,2669.53 v1(4409.53,2669.53)
OUTB: D2.1 J4.2 R7.1 U1.6 | length 1047.4
  Top Layer w15: U1.6 4140.29,3262.89 4224.09,3346.69 R7.1 4235.91,3346.69 4254,3328.6 4254,3242 4425.53,3070.47 D2.1 4625.47,2920 J4.2
Vin: J1.2 R1.2 | length 747.5
  Top Layer w15: J1.2 3131.57,3236.57 3239,3344 3239,3602.21 3247.79,3611 3402.69,3611 R1.2
pads on no net: R2.3 R3.3 R4.3

## Polygon pours and split planes (outlines as drawn)
GND on Layer 2 (split plane): 4656.34,3976.28 4662.83,3975.17 4669.16,3973.35 4675.25,3970.83 4681.01,3967.64 4686.38,3963.83 4691.29,3959.44 4695.68,3954.53 4699.49,3949.16 4702.68,3943.4 4705.2,3937.31 4707.02,3930.98 4708.13,3924.49 4708.46,3918.49 4708.41,3917.91 4708.41,2303.74 4708.46,2303.16 4708.13,2297.16 4707.02,2290.67 4705.2,2284.34 4702.68,2278.26 4699.49,2272.49 4695.68,2267.12 4691.29,2262.21 4686.38,2257.82 4681.01,2254.01 4675.25,2250.82 4669.16,2248.3 4662.83,2246.48 4656.34,2245.38 4650.34,2245.04 4649.76,2245.1 2838.74,2245.1 2838.16,2245.04 2832.16,2245.38 2825.67,2246.48 2819.34,2248.3 2813.26,2250.82 2807.49,2254.01 2802.12,2257.82 2797.21,2262.21 2792.82,2267.12 2789.01,2272.49 2785.82,2278.26 2783.3,2284.34 2781.48,2290.67 2780.38,2297.16 2780.04,2303.16 2780.1,2303.74 2780.1,3917.91 2780.04,3918.49 2780.38,3924.49 2781.48,3930.98 2783.3,3937.31 2785.82,3943.4 2789.01,3949.16 2792.82,3954.53 2797.21,3959.44 2802.12,3963.83 2807.49,3967.64 2813.26,3970.83 2819.34,3973.35 2825.67,3975.17 2832.16,3976.28 2838.16,3976.61 2838.74,3976.56 4649.76,3976.56 4650.34,3976.61
GND on Layer 3 (split plane): 4656.34,3976.28 4662.83,3975.17 4669.16,3973.35 4675.25,3970.83 4681.01,3967.64 4686.38,3963.83 4691.29,3959.44 4695.68,3954.53 4699.49,3949.16 4702.68,3943.4 4705.2,3937.31 4707.02,3930.98 4708.13,3924.49 4708.46,3918.49 4708.41,3917.91 4708.41,2303.74 4708.46,2303.16 4708.13,2297.16 4707.02,2290.67 4705.2,2284.34 4702.68,2278.26 4699.49,2272.49 4695.68,2267.12 4691.29,2262.21 4686.38,2257.82 4681.01,2254.01 4675.25,2250.82 4669.16,2248.3 4662.83,2246.48 4656.34,2245.38 4650.34,2245.04 4649.76,2245.1 2838.74,2245.1 2838.16,2245.04 2832.16,2245.38 2825.67,2246.48 2819.34,2248.3 2813.26,2250.82 2807.49,2254.01 2802.12,2257.82 2797.21,2262.21 2792.82,2267.12 2789.01,2272.49 2785.82,2278.26 2783.3,2284.34 2781.48,2290.67 2780.38,2297.16 2780.04,2303.16 2780.1,2303.74 2780.1,3917.91 2780.04,3918.49 2780.38,3924.49 2781.48,3930.98 2783.3,3937.31 2785.82,3943.4 2789.01,3949.16 2792.82,3954.53 2797.21,3959.44 2802.12,3963.83 2807.49,3967.64 2813.26,3970.83 2819.34,3973.35 2825.67,3975.17 2832.16,3976.28 2838.16,3976.61 2838.74,3976.56 4649.76,3976.56 4650.34,3976.61

## Silkscreen, mask and mechanical layers (free items; w line width, h text height)
Top Overlay:
  lines w19.68: 3050,3080 3110,3080 ; 3080,3050 3080,3110 ; 3710,3690 3770,3690 ; 3740,3660 3740,3720
  text "Window Comparator - V1" at 2980,3881.66 h35
  text "DALVAC - 02/24" at 2975,3815 h31.5
  text "+5V" at 4250,3800 h59.06
  text "VIN" at 2850,3580 h59.06
  text "OV" at 4430,3170 h60
  text "OUTB" at 4410,2900 h39.37
  text "INA" at 2860,2810 h39.37
  text "OUTA" at 4410,2800 h39.37
  text "INB" at 2860,2710 h39.37
  text "UV" at 4430,2490 h60
Mechanical 1:
  the board outline again, w10